# Altium PCB PCB1.PcbDoc
Units mil, origin at the board's own origin, x right, y up, seen from the top; angles counter-clockwise.
Board outline 789 x 630 mil, 2 copper layers (Top Layer, Bottom Layer); 4 components, 4 nets, 10 pads, 0 vias.
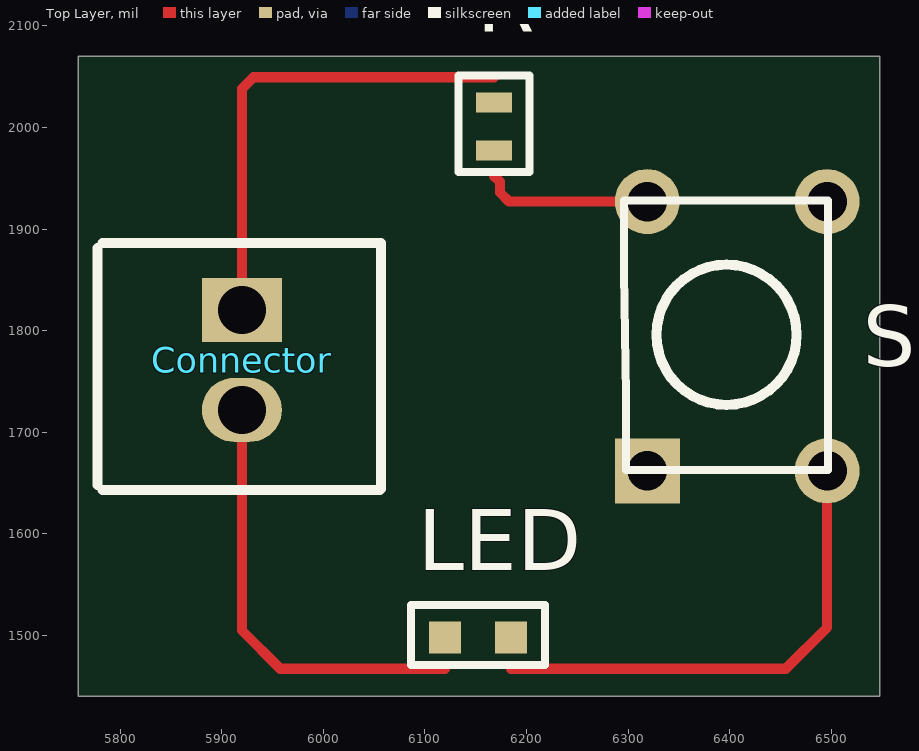
[diagram p0: Top Layer view]
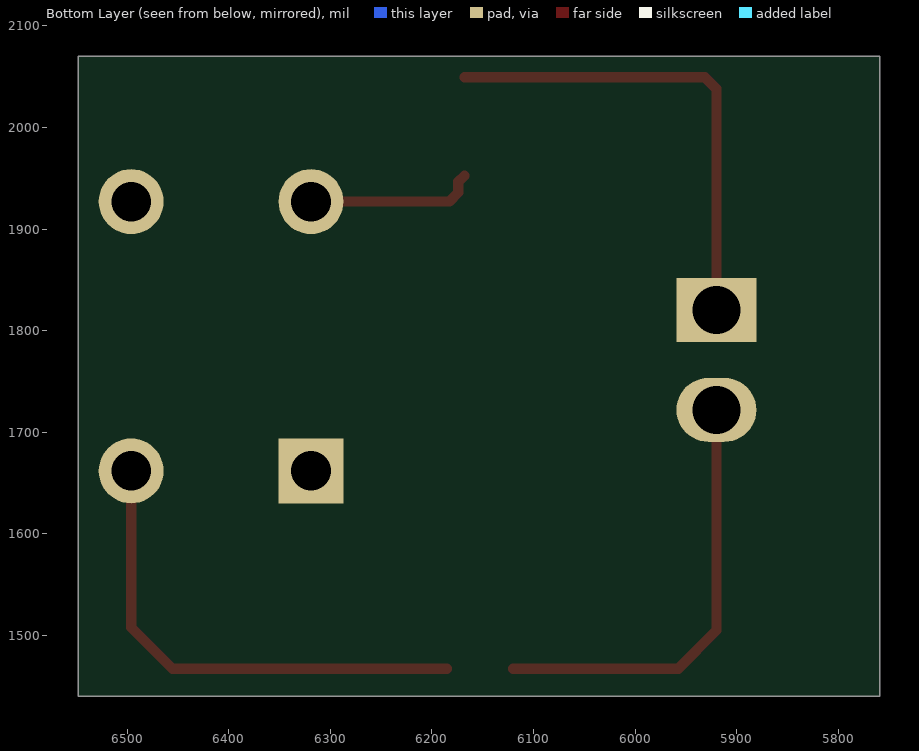
[diagram p1: Bottom Layer view, seen from below]

## Layer stack, top to bottom
Top Solder: solder mask 0.4, Solder Resist, Dk 3.5
Top Layer: signal copper 1.4
Dielectric 1: dielectric 12.6, FR-4, Dk 4.8
Bottom Layer: signal copper 1.4
Bottom Solder: solder mask 0.4, Solder Resist, Dk 3.5

## Board outline
5759,1440 6548,1440 6548,2070 5759,2070

## Design rules (kind name [scope] priority, off if disabled: settings)
Clearance [All] p1: gap=10 ignorepadtopadclearanceinfootprint=FALSE
PolygonConnect [All] p1: connectstyle=Relief reliefconductorwidth=10 reliefentries=4 polygonreliefangle="90 Angle" airgapwidth=10
RoutingVias [All] p1: holewidth=28 width=50 viastyle="Through Hole" minholewidth=28 minwidth=50 maxholewidth=28 maxwidth=50
SolderMaskExpansion [All] p1: expansion=4 istentingtop=FALSE
Width [All] p1: maxlimit=10 minlimit=10 preferedwidth=10
30 further rules are at their usual default settings.

## Components (designator, comment, footprint, x,y, rotation, side; value= is the part's Value field where it differs from the comment)
Connector "Component_1" Connector 5920,1771.21 r0 top (schematic designator *)
LED "LED" LED 6152.52,1498 r0 top (schematic designator *)
R "R" Resistor0603 6168,2001 r90 top (schematic designator *)
Switch "Switch" Swicth 6319,1662 r90 top (schematic designator *)

## Footprints (in the part's own frame and the unit in brackets; to place one, negate y for a bottom-side part, rotate by r counter-clockwise, add the part's x,y. Pads: shape width x height; smd on the part's side, far side on the other; paste and mask are expansions set on the pad)
Connector [mm]
  rect 2x1.6 hole 1.2: 1(0,1.25)
  oval 2x1.6 hole 1.2: 2(0,-1.25)
  silkscreen extent -3.61,-3.25 3.48,2.92
LED [mm]
  rect 0.8x0.8 smd: 1(-0.825,0) 2(0.825,0)
  silkscreen extent -1.68,-0.69 1.68,0.81
Resistor0603 [mm]
  rect 0.5x0.9 smd: 1(-0.6,0) 2(0.6,0)
  silkscreen extent -1.14,-0.89 1.27,0.89, body extent -0.8,-0.38 0.8,0.48, height 0.48
Swicth [mil]
  rect 64x64 hole 39: 1(0,0)
  round 64 hole 39: 2(0,-177) 3(265,0) 4(265,-177)
  silkscreen extent 1,-178 266,23

## Nets (pads, with @x,y where several pads share a name; then routed paths per layer and width w, separated by ;. In a path a pad name is that pad's centre, name@x,y a point inside that pad or via, vN(x,y) a via of type N, cw(c..) or ccw(c..) an arc to the next point about the centre after c; other vN are vias at no path point)
Net*_1: 
Net*_2: 
Net*_3: 
Net*_34: 
pads on no net: Connector.1 Connector.2 LED.1 LED.2 R.1 R.2 Switch.1 Switch.2 Switch.3 Switch.4
copper on no net: | length 1552.9
  Top Layer w10: 5920,1722 5920,1504.86 5957.61,1467.25 6120.04,1467.25 ; 5920,1820.43 5920,2038.14 5931.32,2049.46 6168,2049.46 ; 6168,1952.54 6174,1946.54 6174,1936 6183,1927 6319,1927 ; 6185,1467.25 6455.39,1467.25 6496,1507.86 6496,1662